# Allegro board VSC8541XMV_CUSTOMER_REF_BOARD_16-0351_PCB_0514.brd
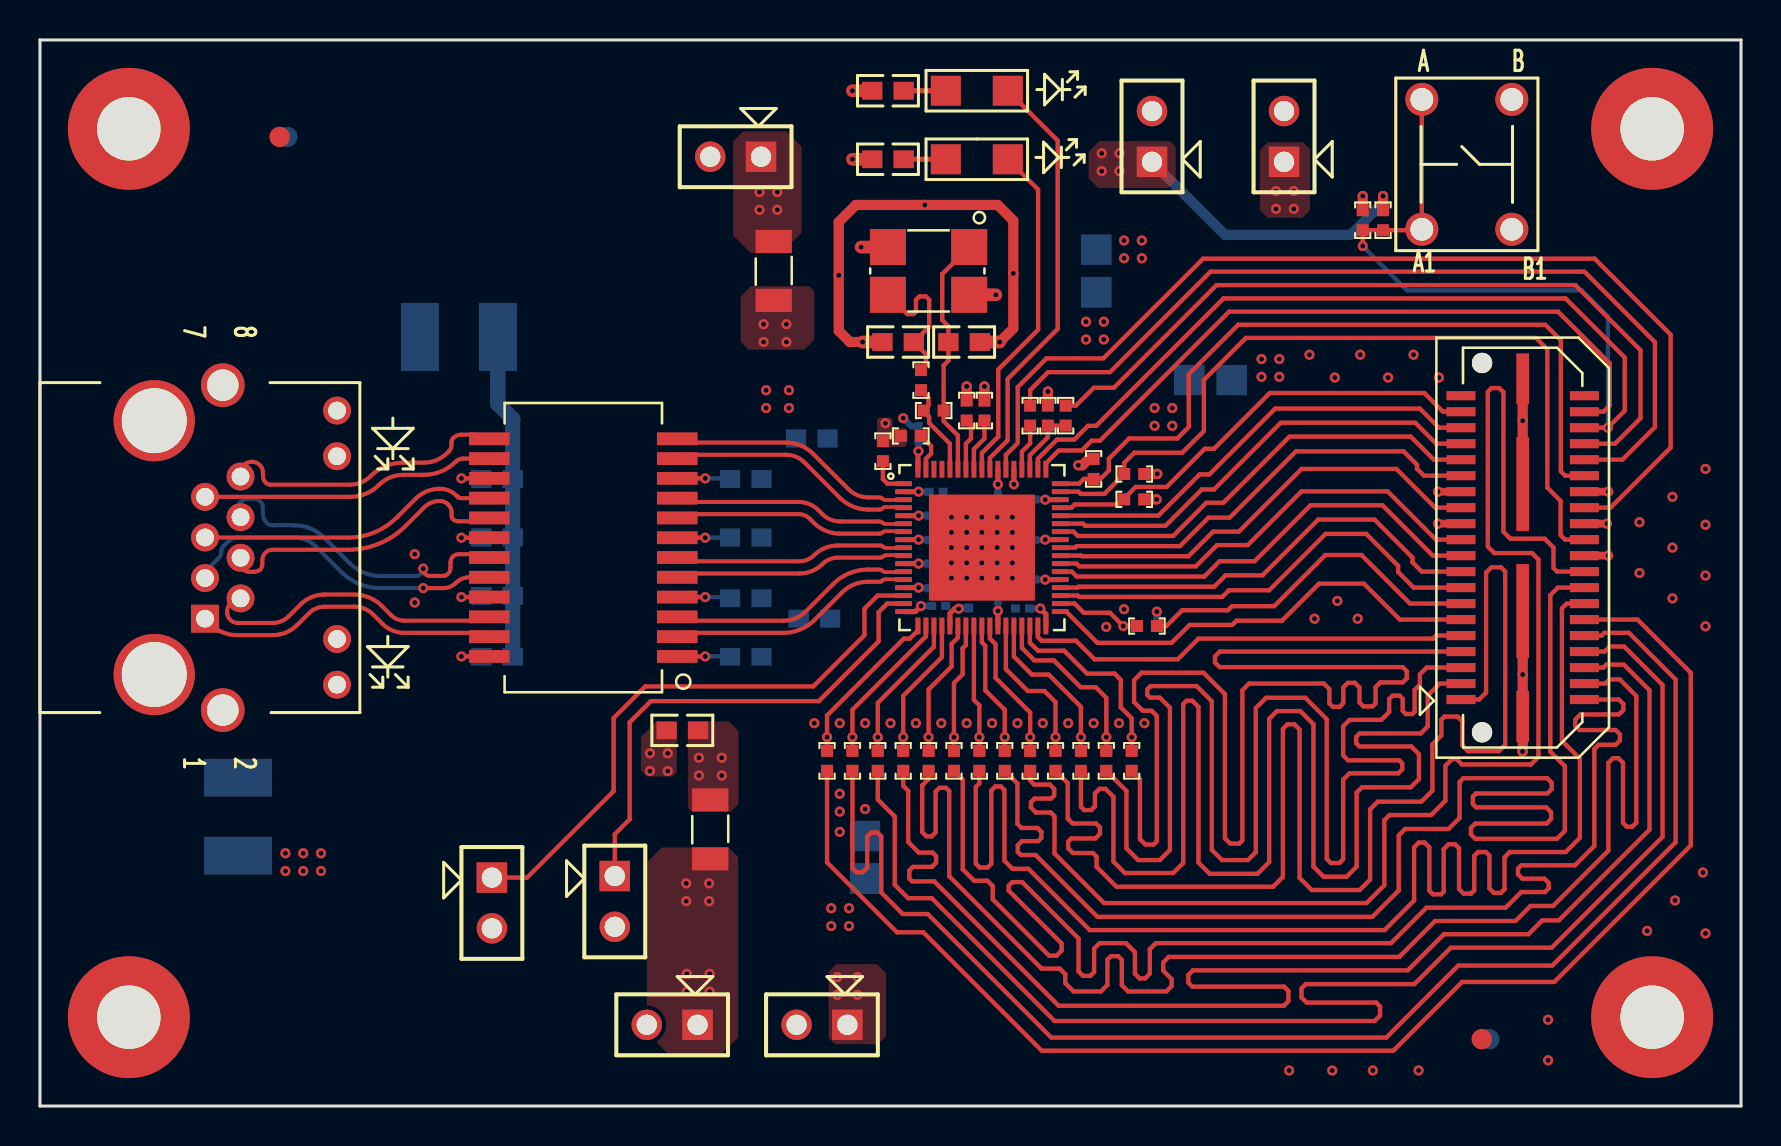
[diagram p0: board, top side]
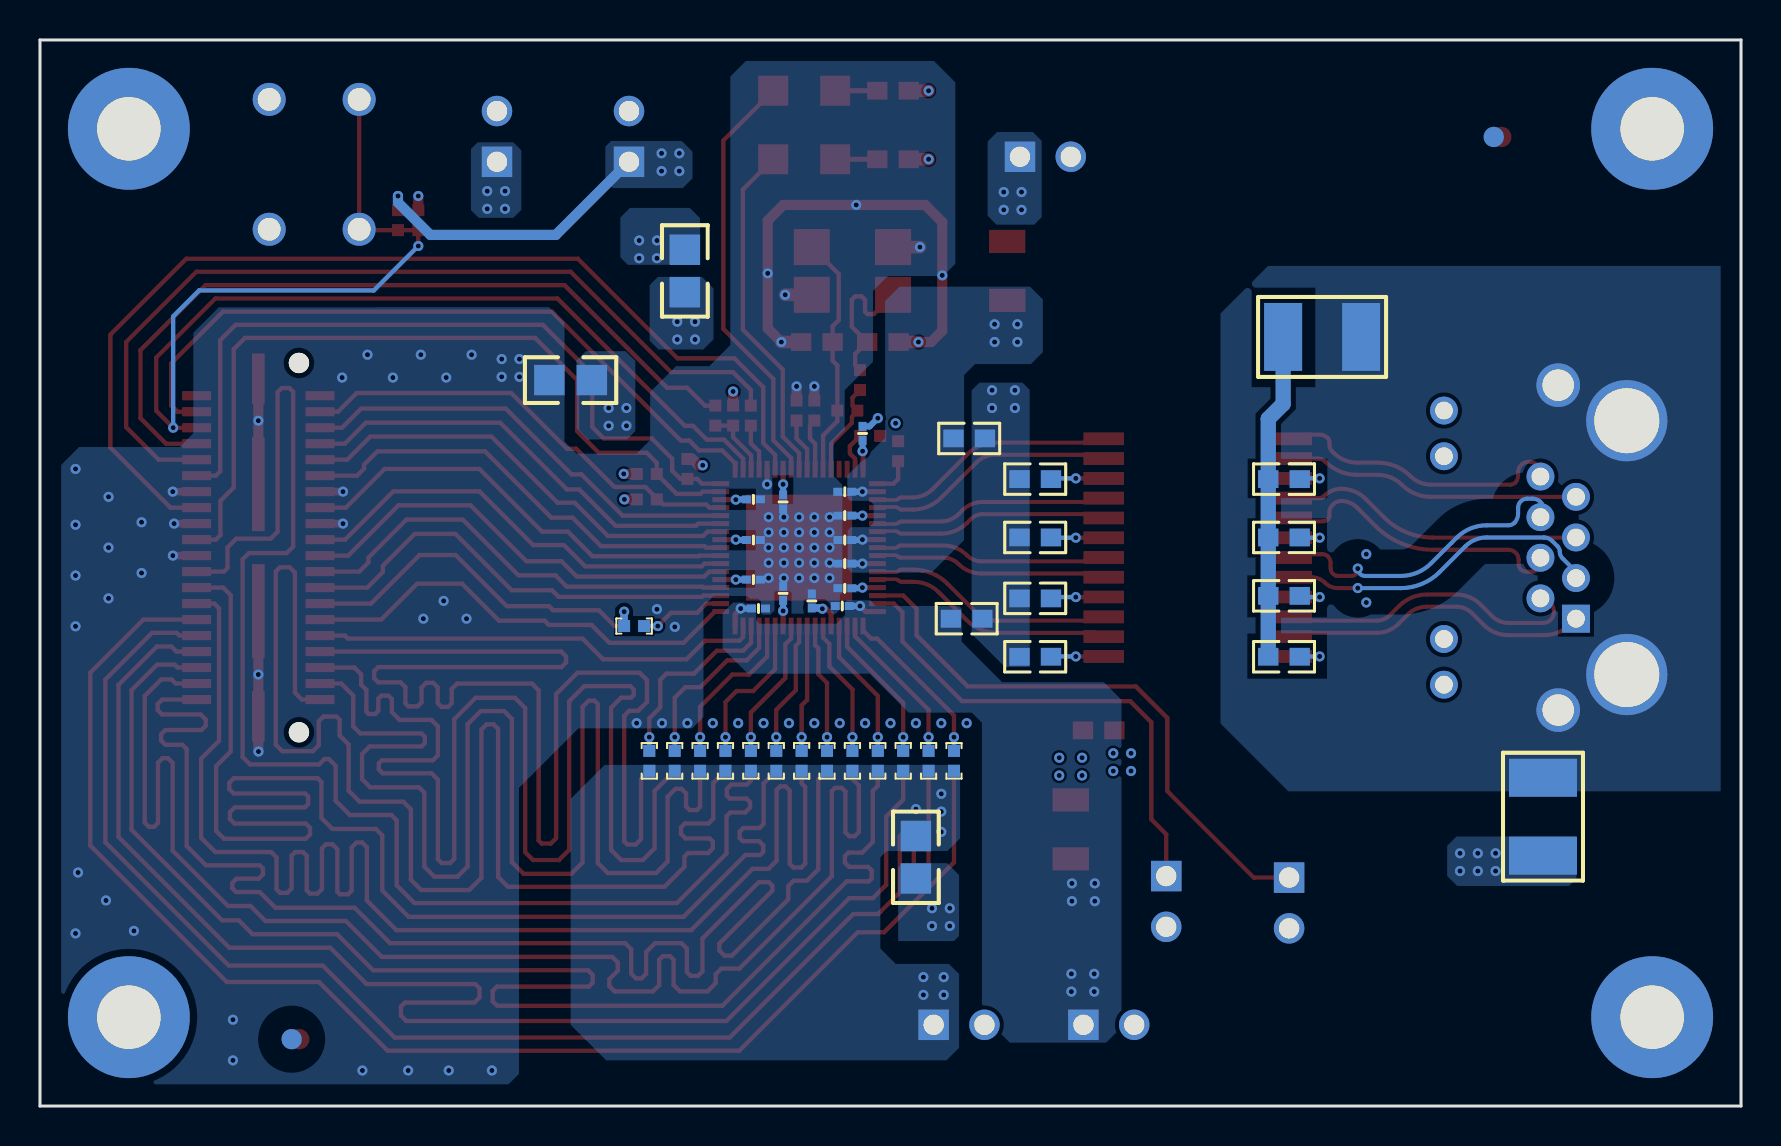
[diagram p1: board, bottom side, seen from below]

Outline 85.09 x 53.34 mm; copper layers: TOP, L2_GND, L3_PWR, BOTTOM. Coordinates in mm from the lower left corner of the outline.
Outline path: 0,53.34 85.09,53.34 85.09,0 0,0 0,53.34

## Design rules (mm)
net group CLKOUT: nets CLKOUT CLKOUT_QTE
net group COL: nets COL COL_0
net group CRS: nets CRS CRS_0
net group DIFFPAIR0: nets P0_D3N P0_D3P
net group DIFFPAIR1: nets P0_D2N P0_D2P
net group DIFFPAIR2: nets P0_D1N P0_D1P
net group DIFFPAIR3: nets P0_D0N P0_D0P
net group DIFFPAIR4: nets N53972067 N53972090
net group DIFFPAIR5: nets N53972061 N53972087
net group DIFFPAIR6: nets N53972063 N53972075
net group DIFFPAIR7: nets N53972077 N53972079
net group RCVRD_CLK: nets RCVRD_CLK RCVRD_CLK_QTE
net group RX_CLK: nets RX_CLK RX_CLK_0
net group RX_DV/RX_CTL: nets RX_DV/RX_CTL RX_DV/RX_CTL_0
net group RX_ER: nets RX_ER RX_ER_0
net group RXD0: nets RXD0 RXD0_0
net group RXD1: nets RXD1 RXD1_0
net group RXD2: nets RXD2 RXD2_0
net group RXD3: nets RXD3 RXD3_0
net group RXD4: nets RXD4 RXD4_0
net group RXD5: nets RXD5 RXD5_0
net group RXD6: nets RXD6 RXD6_0
net group RXD7: nets RXD7 RXD7_0
net group TX_CLK: nets TX_CLK TX_CLK_0
net group CLS1: nets N54023815 XTAL1 XTAL2
net group CLS2: nets GTX_CLK TX_EN/TX_CTL TX_ER TXD0 TXD1 TXD2 TXD3 TXD4 TXD5 TXD6 TXD7

## Placement (name value [footprint] x y rotation side)
C1  0.1uF  [C0603]  35.31 22.48 0 bottom
C2  0.1uF  [C0603]  35.31 25.4 0 bottom
C3  0.1uF  [C0603]  35.31 28.45 0 bottom
C4  0.1uF  [C0603]  35.31 31.37 0 bottom
C5  1000pF, 3KV  [C1812]  9.91 14.48 270 bottom
C14  0.01uF/16V/X5R  [C0402]  43.56 33.53 180 top
C16  0.1uF  [C0201]  47.92 30.23 270 bottom
C20  0.1uF  [C0201]  47.92 25.65 90 bottom
C21  0.1uF  [C0201]  49.4 26.34 180 bottom
C35  0.1uF  [C0201]  44.83 27.14 0 bottom
C40  0.1uF  [C0201]  43.94 33.66 90 bottom
C41  0.1uF  [C0201]  44.83 25.91 0 bottom
C42  0.1uF  [C0201]  44.83 29.54 0 bottom
C44  0.1uF  [C0201]  49.15 24.89 180 bottom
C45  0.1uF  [C0201]  44.96 25.02 0 bottom
C50  10uF  [C0603]  38.73 24.38 180 bottom
C51  10uF  [C0805]  58.55 36.32 0 bottom
C835  1000pF, 3KV  [C1812]  20.95 38.48 180 bottom
C836  0.1uF  [C0201]  49.4 30.35 180 bottom
C838  10uF  [C0603]  38.61 33.4 180 bottom
C840  0.1uF  [C0201]  49.4 28.32 180 bottom
C845  10uF  [C0805]  41.27 12.45 270 bottom
C849  0.1uF  [C0201]  44.83 28.32 0 bottom
C850  0.1uF  [C0201]  44.83 30.73 0 bottom
C869  10uF  [C0805]  52.83 41.78 90 bottom
C870  1uF  [0402]  66.17 44.32 270 top
C879  18pF_50V  [C0603]  46.23 38.23 0 top
C880  18pF_50V  [C0603]  42.93 38.23 180 top
C881  10uF  [C0603]  32.13 18.8 180 top
C882  0.1uF  [C0201]  46.48 25.27 90 bottom
D14  GREEN  [LED_1206]  46.86 47.37 0 top
D17  GREEN  [LED_1206]  46.86 50.8 0 top
J12  -  [RJHSE-5384]  9.14 27.94 270 top
J90  HEADER 1x2  [1X2HDR]  55.63 47.24 180 top
J92  HEADER 1x2  [1X2HDR]  62.23 47.24 180 top
J93  HEADER 1x2  [1X2HDR]  40.39 4.06 270 top
J94  HEADER 1x2  [1X2HDR]  36.07 47.5 270 top
J95  HEADER 1x2  [1X2HDR]  32.89 4.06 270 top
J96  -  [QTE-020-01-F-D-A]  74.17 27.94 90 top
J97  HEADER 1x2  [1X2HDR]  22.61 11.43 0 top
J98  HEADER 1x2  [1X2HDR]  28.75 11.51 0 top
L2  BLM31PG121SN  [COIL_1206]  36.7 41.78 90 top
L3  BLM31PG121SN  [COIL_1206]  33.53 13.84 270 top
NOREF  -  []  0 53.34 0 top
NOREF#2  -  [unnamed#2]  80.65 4.45 0 top
NOREF#3  -  [unnamed#3]  11.99 48.49 0 top
NOREF#4  -  []  85.09 53.34 0 top
NOREF#5  -  []  300.38 6.54 0 top
NOREF#6  -  []  4.45 4.45 0 top
NOREF#7  -  []  85.09 53.34 0 top
NOREF#8  -  [unnamed#2]  80.65 48.9 0 top
NOREF#9  -  [unnamed#2]  4.45 48.9 0 top
NOREF#10  -  [unnamed#3]  72.12 3.35 0 top
NOREF#11  -  [unnamed#2]  4.45 4.45 0 top
NOREF#12  -  []  85.09 0 0 top
NOREF#13  -  []  4.45 4.45 0 top
NOREF#14  -  [unnamed#3]  12.37 48.49 180 bottom
NOREF#15  -  [unnamed#3]  72.5 3.35 180 bottom
R1  75  [R0603]  22.86 31.37 0 bottom
R2  75  [R0603]  22.86 28.45 0 bottom
R3  75  [R0603]  22.86 22.48 0 bottom
R4  75  [R0603]  22.86 25.53 0 bottom
R5  510  [R0603]  42.42 47.37 0 top
R62  39_1%  [0402]  50.8 17.27 90 top
R63  39_1%  [0402]  49.53 17.27 90 top
R64  39_1%  [0402]  48.26 17.27 90 top
R65  39_1%  [0402]  46.99 17.27 90 top
R70  39_1%  [0402]  52.07 17.27 90 top
R398  39_1%  [0402]  54.61 17.27 90 top
R400  510  [R0603]  42.42 50.8 0 top
R412  10K  [R0402]  52.7 31.88 270 top
R417  2K_1%  [R0402]  42.16 32.77 270 top
R432  4.7K_1%  [R0402]  54.74 31.62 180 top
R434  2K  [R0402]  67.18 44.32 270 top
R470  39_1%  [0402]  51.31 34.54 90 top
R482  10k_1%  [0402]  50.8 17.27 90 bottom
R483  10k_1%  [0402]  49.53 17.27 90 bottom
R484  10k_1%  [0402]  48.26 17.27 90 bottom
R485  10k_1%  [0402]  46.99 17.27 90 bottom
R486  10k_1%  [0402]  45.72 17.27 90 bottom
R487  10k_1%  [0402]  44.45 17.27 90 bottom
R488  10k_1%  [0402]  43.18 17.27 90 bottom
R489  39_1%  [0402]  53.34 17.27 90 top
R490  39_1%  [0402]  40.64 17.27 90 top
R491  39_1%  [0402]  39.37 17.27 90 top
R492  39_1%  [0402]  44.45 17.27 90 top
R493  39_1%  [0402]  43.18 17.27 90 top
R494  39_1%  [0402]  45.72 17.27 90 top
R495  39_1%  [0402]  41.91 17.27 90 top
R500  39_1%  [0402]  49.53 34.54 90 top
R501  39_1%  [0402]  55.37 24.02 180 top
R502  10k_1%  [0402]  41.91 17.27 90 bottom
R504  10k_1%  [0402]  50.42 34.54 270 top
R505  10k_1%  [0402]  54.61 17.27 90 bottom
R506  10k_1%  [0402]  55.37 24.02 180 bottom
R507  10k_1%  [0402]  52.07 17.27 90 bottom
R508  10k_1%  [0402]  53.34 17.27 90 bottom
R509  10k_1%  [0402]  39.37 17.27 90 bottom
R510  10k_1%  [0402]  40.64 17.27 90 bottom
R523  10K  [R0402]  46.35 34.8 90 top
R524  10K  [R0402]  47.24 34.8 90 top
R527  39_1%  [0402]  44.07 36.32 90 top
R528  1M  [R0402]  44.7 34.8 0 top
R529  4.7K_1%  [R0402]  54.74 30.35 180 top
SW10  -  [EVQ-PAD04M]  71.37 47.12 0 top
U2  -  [TG111-MSCE13LF]  27.18 27.94 270 top
U169  VSC8541XMV  [QFN68_8X8]  47.12 27.94 90 top
X1  25MHz  [SMT_XTAL_5MMX3P2MM]  44.45 41.78 180 top

## Library data of the parts
C1-C4 = CAP_0
C5 C835 = CAP_1812
C14 = CAP_0402
C16 C20 C21 C35 C40-C42 C44 C45 C836 C840 C849 C850 C882 = CAP_0201
C50 C838 C879-C881 = CAP_0603
C51 C845 C869 = CAP_0805
C870 = CAPACITOR NON-POL
D14 D17 = LED_1206
J12 = RJHS-5384-04
J90 J92-J95 J97 J98 = CON2_3
J96 = QTE-020-01-F-D-A
L2 L3 = COIL_1206
R1-R5 R400 = RES_0603
R62-R65 R70 R398 R470 R489-R495 R500 R501 = R_0: signal model: R_0_0402_39_1%_39_1%
R412 R417 R434 R523 R524 R528 = RES_0402
R432 R482-R488 R502 R504-R510 R529 = RESISTOR
R527 = R_0
SW10 = PB_SWITCH_0
U2 = H5008NL
U169 = VSC8541XMV
X1 = XTAL-25M_0

## Footprints (pads in the part's own frame, mm; a bottom-side part is the same pattern mirrored in y, then rotated)
1X2HDR
  rect 1.524x1.524 hole 1.016: 1(0,0)
  round 1.524 hole 1.016: 2(0,-2.54)
0402
  rect 0.599x0.599 smd: 1(-0.5,0) 2(0.5,0)
C0201
  rect 0.45x0.4 smd: 1(-0.35,0) 2(0.35,0)
C0402
  rect 0.599x0.599 smd: 1(-0.5,0) 2(0.5,0)
C0603
  rect 1.016x0.889 smd: 1(-0.787,0) 2(0.787,0)
C0805
  rect 1.524x1.524 smd: 1(-1.062,0) 2(1.062,0)
C1812
  rect 1.9x3.4 smd: 1(-1.95,0) 2(1.95,0)
COIL_1206
  rect 1.16x1.82 smd: 1(-1.475,0) 2(1.475,0)
EVQ-PAD04M
  round 1.651 hole 1.143: A(-2.25,3.25) A1(-2.25,-3.25) B(2.25,3.25) B1(2.25,-3.25)
LED_1206
  rect 1.5x1.5 smd: 1(1.55,0) 2(-1.55,0)
QFN68_8X8
  rect 0.25x0.84 smd: 1(3.2,3.92) 2(2.8,3.92) 3(2.4,3.92) 4(2,3.92) 5(1.6,3.92) 6(1.2,3.92) 7(0.8,3.92) 8(0.4,3.92) 9(0,3.92) 10(-0.4,3.92) 11(-0.8,3.92) 12(-1.2,3.92) 13(-1.6,3.92) 14(-2,3.92) 15(-2.4,3.92) 16(-2.8,3.92) 17(-3.2,3.92) 35(-3.2,-3.92) 36(-2.8,-3.92) 37(-2.4,-3.92) 38(-2,-3.92) 39(-1.6,-3.92) 40(-1.2,-3.92) 41(-0.8,-3.92) 42(-0.4,-3.92) 43(0,-3.92) 44(0.4,-3.92) 45(0.8,-3.92) 46(1.2,-3.92) 47(1.6,-3.92) 48(2,-3.92) 49(2.4,-3.92) 50(2.8,-3.92) 51(3.2,-3.92)
  rect 0.84x0.25 smd: 18(-3.92,3.2) 19(-3.92,2.8) 20(-3.92,2.4) 21(-3.92,2) 22(-3.92,1.6) 23(-3.92,1.2) 24(-3.92,0.8) 25(-3.92,0.4) 26(-3.92,0) 27(-3.92,-0.4) 28(-3.92,-0.8) 29(-3.92,-1.2) 30(-3.92,-1.6) 31(-3.92,-2) 32(-3.92,-2.4) 33(-3.92,-2.8) 34(-3.92,-3.2) 52(3.92,-3.2) 53(3.92,-2.8) 54(3.92,-2.4) 55(3.92,-2) 56(3.92,-1.6) 57(3.92,-1.2) 58(3.92,-0.8) 59(3.92,-0.4) 60(3.92,0) 61(3.92,0.4) 62(3.92,0.8) 63(3.92,1.2) 64(3.92,1.6) 65(3.92,2) 66(3.92,2.4) 67(3.92,2.8) 68(3.92,3.2)
  rect 5.3x5.3 smd: 69(0,0)
QTE-020-01-F-D-A
  round 1.019 hole 1.016 unplated: (-9.239,2.032) (9.239,2.032)
  rect 0.457x1.448 smd: 1(-7.601,3.086) 2(-7.601,-3.086) 3(-6.801,3.086) 4(-6.801,-3.086) 5(-6.001,3.086) 6(-6.001,-3.086) 7(-5.201,3.086) 8(-5.201,-3.086) 9(-4.401,3.086) 10(-4.401,-3.086) 11(-3.6,3.086) 12(-3.6,-3.086) 13(-2.8,3.086) 14(-2.8,-3.086) 15(-2,3.086) 16(-2,-3.086) 17(-1.2,3.086) 18(-1.2,-3.086) 19(-0.4,3.086) 20(-0.4,-3.086) 21(0.4,3.086) 22(0.4,-3.086) 23(1.2,3.086) 24(1.2,-3.086) 25(2,3.086) 26(2,-3.086) 27(2.8,3.086) 28(2.8,-3.086) 29(3.6,3.086) 30(3.6,-3.086) 31(4.401,3.086) 32(4.401,-3.086) 33(5.201,3.086) 34(5.201,-3.086) 35(6.001,3.086) 36(6.001,-3.086) 37(6.801,3.086) 38(6.801,-3.086) 39(7.601,3.086) 40(7.601,-3.086)
  rect 2.54x0.635 smd: 42(-8.445,0) 45(8.445,0)
  rect 4.699x0.635 smd: 43(-3.175,0) 44(3.175,0)
R0402
  rect 0.599x0.599 smd: 1(-0.5,0) 2(0.5,0)
R0603
  rect 1.016x0.889 smd: 1(-0.787,0) 2(0.787,0)
RJHSE-5384
  rect 1.397x1.397 hole 0.889: 1(3.556,-0.889)
  round 1.397 hole 0.889: 2(2.54,0.889) 3(1.524,-0.889) 4(0.508,0.889) 5(-0.508,-0.889) 6(-1.524,0.889) 7(-2.54,-0.889) 8(-3.556,0.889) 9(6.858,5.715) 10(4.572,5.715) 11(-4.572,5.715) 12(-6.858,5.715)
  round 2.184 hole 1.575: 13(-8.128,0) 14(8.128,0)
  round 4.064 hole 3.251: 15(-6.35,-3.429) 16(6.35,-3.429)
SMT_XTAL_5MMX3P2MM
  rect 1.803x1.803 smd: 1(-2.032,-1.194) 2(2.032,-1.194) 3(2.032,1.194) 4(-2.032,1.194)
TG111-MSCE13LF
  rect 0.64x2.03 smd: 1(5.445,4.7) 2(4.455,4.7) 3(3.465,4.7) 4(2.475,4.7) 5(1.485,4.7) 6(0.495,4.7) 7(-0.495,4.7) 8(-1.485,4.7) 9(-2.475,4.7) 10(-3.465,4.7) 11(-4.455,4.7) 12(-5.445,4.7) 13(-5.445,-4.7) 14(-4.455,-4.7) 15(-3.465,-4.7) 16(-2.475,-4.7) 17(-1.485,-4.7) 18(-0.495,-4.7) 19(0.495,-4.7) 20(1.485,-4.7) 21(2.475,-4.7) 22(3.465,-4.7) 23(4.455,-4.7) 24(5.445,-4.7)
unnamed#2
  round 6.096 hole 3.175 unplated: (0,0)
unnamed#3
  round 1.016 smd: (0,0)

## Nets
GND: C1.2 C2.2 C3.2 C4.2 C5.2 C14.2 C16.2 C20.2 C21.2 C35.2 C40.2 C41.2 C42.2 C44.2 C45.2 C50.2 C51.2 C836.2 C838.2 C840.2 C845.2 C849.2 C850.2 C869.2 C870.1 C879.2 C880.2 C881.2 C882.2 J90.2 J92.2 J93.2 J94.2 J95.2 J96.20 J96.23 J96.24 J96.27 J96.28 J96.42(BLADE#42) J96.43(BLADE#43) J96.44(BLADE#44) J96.45(BLADE#45) J97.2 J98.2 R417.1 R523.2 R524.2 SW10.B SW10.B1 U169.56(COMA_MODE) U169.69(P_GND) X1.2 X1.4
GND_EARTH: C5.1 C835.2 J12.13(CASE_1) J12.14(CASE_2) J12.15(CASE_3) J12.16(CASE_4)
VDD1: C44.1 C45.1 C50.1 J95.1 L3.2 U169.17(VDD11) U169.34(VDD12)
VDD1A_FILT: C40.1 C41.1 C42.1 C881.1 L3.1 U169.5(VDD1A1) U169.14(VDD1A2) U169.68(VDD1A3)
VDD25: J94.1 L2.2
VDD25A_FILT: C35.1 C838.1 C849.1 C850.1 L2.1 U169.2(VDD25A1) U169.8(VDD25A2) U169.11(VDD25A3)
VDDIO: C16.1 C869.1 J90.1 R5.1 R400.1 R434.1 R504.1 U169.58(VDDIO)
VDDMAC: C20.1 C21.1 C840.1 C845.1 C882.1 J93.1 R482.1 R483.1 R484.1 R485.1 R486.1 R487.1 R488.1 R502.1 R505.1 R506.1 R507.1 R508.1 R509.1 R510.1 U169.22(VDDMAC1) U169.28(VDDMAC2) U169.39(VDDMAC3) U169.44(VDDMAC4)
VDDMDIO: C51.1 C836.1 J92.1 R412.1 R432.1 R529.1 U169.49(VDDMDIO)
CLK_SQUELCH_IN: J96.26 U169.57(CLK_SQUELCH_IN)
CLKOUT: R470.1 R504.2 U169.54(CLKOUT)
CLKOUT_QTE: J96.34 R470.2
COL: R491.2 R509.2 U169.18(COL)
COL_0: J96.12 R491.1
CRS: R490.2 R510.2 U169.19(CRS)
CRS_0: J96.10 R490.1
FASTLINK_FAIL: J96.38 U169.52(FASTLINK_FAIL)
GTX_CLK: J96.15 U169.37(TX_CLK)
LED0: D14.1(CATHODE) U169.60(LED0)
LED1: D17.1(CATHODE) U169.59(LED1)
MDC: J96.37 R529.2 U169.48(MDC)
MDINT: J96.30 R412.2 U169.51(MDINT)
MDIO: J96.22 R432.2 U169.50(MDIO)
NRESET: C870.2 J96.36 R434.2 SW10.A SW10.A1 U169.53(NRESET)
P0_D0N: U2.3(TD1-) U169.12(P0_D0N)
P0_D0P: U2.2(TD1+) U169.13(P0_D0P)
P0_D1N: U2.6(TD2-) U169.9(P0_D1N)
P0_D1P: U2.5(TD2+) U169.10(P0_D1P)
P0_D2N: U2.9(TD3-) U169.6(P0_D2N)
P0_D2P: U2.8(TD3+) U169.7(P0_D2P)
P0_D3N: U2.12(TD4-) U169.3(P0_D3N)
P0_D3P: U2.11(TD4+) U169.4(P0_D3P)
RCVRD_CLK: R500.1 U169.55(RCVRD_CLK)
RCVRD_CLK_QTE: J96.32 R500.2
REF_FILT: C14.1 U169.67(REF_FILT)
REF_REXT: R417.2 U169.1(REF_REXT)
REFCLK_SEL_0: R523.1 U169.62(REFCLK_SEL_0)
REFCLK_SEL_1: R524.1 U169.61(REFCLK_SEL_1)
RX_CLK: R398.2 R505.2 U169.32(RX_CLK)
RX_CLK_0: J96.7 R398.1
RX_DV/RX_CTL: R70.2 R507.2 U169.30(RX_DV/RX_CTL)
RX_DV/RX_CTL_0: J96.3 R70.1
RX_ER: R489.2 R508.2 U169.31(RX_ER)
RX_ER_0: J96.5 R489.1
RXD0: R62.2 R482.2 U169.29(RXD0)
RXD0_0: J96.1 R62.1
RXD1: R63.2 R483.2 U169.27(RXD1)
RXD1_0: J96.18 R63.1
RXD2: R64.2 R484.2 U169.26(RXD2)
RXD2_0: J96.16 R64.1
RXD3: R65.2 R485.2 U169.25(RXD3)
RXD3_0: J96.14 R65.1
RXD4: R486.2 R494.2 U169.24(RXD4)
RXD4_0: J96.2 R494.1
RXD5: R487.2 R492.2 U169.23(RXD5)
RXD5_0: J96.4 R492.1
RXD6: R488.2 R493.2 U169.21(RXD6)
RXD6_0: J96.6 R493.1
RXD7: R495.2 R502.2 U169.20(RXD7)
RXD7_0: J96.8 R495.1
THERMDA: J97.1 U169.15(THERMDA)
THERMDC_VSS: J98.1 U169.16(THERMDC_VSS)
TX_CLK: R501.2 R506.2 U169.36(MII_TXCLK)
TX_CLK_0: J96.13 R501.1
TX_EN/TX_CTL: J96.9 U169.33(TX_EN/TX_CTL)
TX_ER: J96.11 U169.35(TX_ER)
TXD0: J96.17 U169.38(TXD0)
TXD1: J96.19 U169.40(TXD1)
TXD2: J96.21 U169.41(TXD2)
TXD3: J96.25 U169.42(TXD3)
TXD4: J96.29 U169.43(TXD4)
TXD5: J96.31 U169.45(TXD5)
TXD6: J96.33 U169.46(TXD6)
TXD7: J96.35 U169.47(TXD7)
XTAL1: C879.1 R528.2 U169.63(XTAL1) X1.1
XTAL2: R527.1 R528.1 U169.64(XTAL2)
N53972047: C1.1 U2.1(TCT1)
N53972051: C2.1 U2.4(TCT2)
N53972055: C3.1 U2.7(TCT3)
N53972058: C4.1 U2.10(TCT4)
N53972061: J12.5 U2.16(MX3-)
N53972063: J12.6 U2.19(MX2-)
N53972065: R3.1 U2.24(MCT1)
N53972067: J12.8 U2.13(MX4-)
N53972068: R4.1 U2.21(MCT2)
N53972071: R2.1 U2.18(MCT3)
N53972073: R1.1 U2.15(MCT4)
N53972075: J12.3 U2.20(MX2+)
N53972077: J12.2 U2.22(MX1-)
N53972079: J12.1 U2.23(MX1+)
N53972087: J12.4 U2.17(MX3+)
N53972090: J12.7 U2.14(MX4+)
N53972340: C835.1 R1.2 R2.2 R3.2 R4.2
N54023815: C880.1 R527.2 X1.3
N54036519: D14.2(ANODE) R5.2
N54036521: D17.2(ANODE) R400.2

Pads without a net: J12 9 10 11 12; J96 39 40; U169 65 66

## Via types
v1: diameter 0.508, hole 0.254, TOP to BOTTOM, 210 vias

## Routing (per net, layer and track width the routed paths; a pad name or vN(x,y) marks a point on that pad's centre or on a via; arc(x,y) is an arc through that point)
GND: length 49.2
  TOP w0.254: U169.56 v1(48.72,31.11)
  TOP w0.381: J96.20 v1(78.44,27.54) ; J96.24 v1(78.38,29.14) ; J96.23 v1(69.93,29.14) ; J96.28 v1(78.45,30.74) ; J96.27 v1(69.93,30.74)
  TOP w0.508: J96.44 v1(74.17,34.29) J96.45 ; v1(74.16,17.74) 74.17,17.74 J96.42 v1(74.17,21.59) 74.17,24.77 ; v1(41.15,38.23) 40.51,38.23 39.96,38.78 v1(39.96,41.56) 39.96,44.23 40.81,45.09 v1(44.26,45.09) 47.91,45.09 48.69,44.31 v1(48.69,41.66) 48.69,38.91 v1(48.01,38.23) ; R524.2 v1(47.24,36.01) ; C870.1 v1(66.17,45.53) ; R523.2 v1(46.35,36.01)
  TOP w0.635: X1.2 v1(41.07,42.98) ; X1.4 v1(47.81,40.59) ; C880.2 v1(41.15,38.23) ; C879.2 v1(48.01,38.23)
  BOTTOM w0.305: v1(43.18,34.42) 43.59,34.01 C40.2
  vias: v1(12.28,12.65) v1(12.28,11.76) v1(13.17,12.65) v1(13.17,11.76) v1(14.06,12.65) v1(14.06,11.76) v1(30.51,17.65) v1(30.51,16.76) v1(31.4,17.65) v1(31.4,16.76) v1(36.32,35.81) v1(36.32,34.93) v1(37.46,35.81) v1(37.46,34.93) v1(38.73,19.16) v1(39.58,9.9) v1(39.58,9.01) v1(40,19.16) v1(40.47,9.9) v1(40.47,9.01) v1(41.27,19.16) v1(42.29,34.16) v1(42.55,19.16) v1(43.81,19.16) v1(45.09,19.16) v1(45.59,29.46) v1(45.59,28.7) v1(45.59,27.94) v1(45.59,27.18) v1(45.59,26.42) v1(46.35,29.46) v1(46.35,28.7) v1(46.35,27.94) v1(46.35,27.18) v1(46.35,26.42) v1(46.35,19.16) v1(47.12,29.46) v1(47.12,28.7) v1(47.12,27.94) v1(47.12,27.18) v1(47.12,26.42) v1(47.62,19.16) v1(47.88,29.46) v1(47.88,28.7) v1(47.88,27.94) v1(47.88,27.18) v1(47.88,26.42) v1(48.64,29.46) v1(48.64,28.7) v1(48.64,27.94) v1(48.64,27.18) v1(48.64,26.42) v1(48.89,19.16) v1(50.16,19.16) v1(51.43,19.16) v1(52.7,19.16) v1(53.33,23.98) v1(53.98,19.16) v1(54.23,43.31) v1(54.23,42.42) v1(54.23,24.86) v1(55.12,43.31) v1(55.12,42.42) v1(55.24,19.16) v1(61.1,37.37) v1(61.1,36.48) v1(61.99,37.37) v1(61.99,36.48) v1(62.48,1.78) v1(63.5,37.59) v1(63.75,24.38) v1(64.64,1.78) v1(64.77,36.45) v1(64.9,25.27) v1(65.91,24.38) v1(66.04,37.59) v1(66.68,1.78) v1(67.44,36.45) v1(68.71,37.59) v1(68.96,1.78) v1(69.98,36.45) v1(75.44,4.32) v1(75.44,2.29) v1(80.01,29.21) v1(80.01,26.67) v1(80.39,8.76) v1(81.66,30.48) v1(81.66,27.94) v1(81.66,25.4) v1(81.79,10.29) v1(83.19,11.68) v1(83.31,31.88) v1(83.31,29.08) v1(83.31,26.54) v1(83.31,24) v1(83.31,8.64)
GND_EARTH:
  vias: v1(18.75,27.61) v1(18.75,25.19)
VDD1: length 3.1
  TOP w0.254: v1(44.07,25.02) 43.79,24.74 U169.17 ; U169.34 50.32,24.61 v1(50.04,24.89)
  BOTTOM w0.305: C45.1 v1(44.07,25.02) ; C44.1 v1(50.04,24.89)
  vias: v1(32.33,11.14) v1(32.33,10.25) v1(32.35,6.61) v1(32.35,5.73) v1(33.47,11.14) v1(33.47,10.25) v1(33.5,6.61) v1(33.5,5.73)
VDD1A_FILT: length 4
  TOP w0.254: v1(43.94,32.77) 43.92,32.74 U169.68 ; U169.5 v1(43.95,29.54) ; U169.14 v1(43.95,25.94)
  BOTTOM w0.305: v1(43.95,25.94) 43.98,25.91 C41.1 ; C40.1 v1(43.94,32.77) ; C42.1 v1(43.95,29.54)
  vias: v1(32.96,17.43) v1(32.96,16.54) v1(34.1,17.43) v1(34.1,16.54)
VDD25:
  vias: v1(35.99,45.73) v1(35.99,44.84) v1(36.88,45.73) v1(36.88,44.84)
VDD25A_FILT: length 3.9
  TOP w0.254: U169.11 v1(43.95,27.14) ; U169.8 v1(43.95,28.34) ; U169.2 v1(43.95,30.74)
  BOTTOM w0.305: C850.1 43.96,30.73 v1(43.95,30.74) ; v1(43.95,28.34) 43.97,28.32 C849.1 ; C35.1 v1(43.95,27.14)
  vias: v1(36.2,39.12) v1(36.2,38.23) v1(37.34,39.12) v1(37.34,38.23)
VDDIO: length 18.8
  TOP w0.254: U169.58 v1(47.92,31.11)
  TOP w0.508: R434.1 v1(67.18,45.53) ; R504.1 v1(50.42,35.75)
  TOP w0.635: R400.1 v1(40.64,50.8) ; R5.1 v1(40.64,47.37)
  BOTTOM w0.305: C16.1 v1(47.92,31.11)
  BOTTOM w0.508: J90.1 59.28,43.59 65.56,43.59 67.18,45.21 v1(67.18,45.53)
  vias: v1(52.32,39.24) v1(52.32,38.35) v1(53.11,47.67) v1(53.11,46.78) v1(53.21,39.24) v1(53.21,38.35) v1(54,47.67) v1(54,46.78)
VDDMAC: length 6.3
  TOP w0.254: U169.44 v1(50.28,28.34) ; U169.22 45.52,24.65 45.75,24.88 v1(45.95,24.88) ; U169.39 v1(50.28,26.34) ; U169.28 v1(47.92,24.77)
  BOTTOM w0.305: C840.1 50.27,28.32 v1(50.28,28.34) ; C21.1 v1(50.28,26.34) ; C20.1 v1(47.92,24.77)
  BOTTOM w0.381: v1(55.87,24.74) 55.87,24.73 R506.1 ; v1(45.95,24.88) 45.99,24.92 C882.1
  vias: v1(39.88,6.45) v1(39.88,5.56) v1(40,15.62) v1(40,14.73) v1(40,13.72) v1(40.9,6.45) v1(40.9,5.56) v1(41.27,14.86)
VDDMDIO: length 3.5
  TOP w0.254: U169.49 v1(50.28,30.34)
  TOP w0.508: v1(55.89,31.63) 55.88,31.62 R432.1 ; R412.1 52.46,32.38 52.14,32.06 v1(51.94,32.06) ; R529.1 v1(55.86,30.35)
  BOTTOM w0.305: v1(50.28,30.34) 50.27,30.35 C836.1
  vias: v1(55.75,34.93) v1(55.75,34.04) v1(56.64,34.93) v1(56.64,34.04) v1(61.83,45.78) v1(61.83,44.89) v1(62.72,45.78) v1(62.72,44.89)
CLK_SQUELCH_IN: length 52.5
  TOP w0.216: U169.57 48.32,32.58 48.91,33.17 48.91,35.97 50.35,37.41 53.2,37.41 58.18,42.4 77.77,42.4 81.57,38.6 81.57,32.95 78.56,29.94 J96.26
CLKOUT: length 3.4
  TOP w0.216: R470.1 R504.2 50.42,33.46 49.52,32.56 U169.54
CLKOUT_QTE: length 39.3
  TOP w0.216: J96.34 78.79,33.14 80.06,34.42 80.06,37.82 76.8,41.07 58.85,41.07 53.72,35.94 52.72,35.94 51.82,35.04 R470.2
COL: length 9
  TOP w0.216: R491.2 v1(39.37,18.46) 39.37,19.54 43.21,23.39 43.51,23.39 43.92,23.8 U169.18
  BOTTOM w0.216: R491.2 v1(39.37,18.46)
COL_0: length 71
  TOP w0.216: R491.1 39.37,12.19 42.87,8.69 44.18,8.69 50.11,2.77 67.7,2.77 71.14,6.21 75.75,6.21 82.58,13.04 82.58,21.68 79.91,24.34 J96.12
CRS: length 8.5
  TOP w0.216: R490.2 v1(40.64,18.46) 40.64,19.82 44.32,23.5 U169.19
  BOTTOM w0.216: R490.2 v1(40.64,18.46)
CRS_0: length 71.5
  TOP w0.216: J96.10 78.12,23.54 78.25,23.68 79.48,23.68 81.82,21.34 81.82,13.2 75.65,7.03 70.95,7.03 67.35,3.43 50.59,3.43 44.41,9.61 43.16,9.61 42.08,10.68 42.08,13.49 41.89,13.69 41.58,13.69 41.38,13.48 41.38,11.93 41.15,11.7 40.85,11.7 40.64,11.9 R490.1
FASTLINK_FAIL: length 36.2
  TOP w0.216: U169.52 50.32,32.16 50.96,32.8 52.12,32.8 52.61,33.29 53.03,33.29 59.48,39.75 75.94,39.75 78.52,37.16 78.52,35.05 78.21,34.74 J96.38
GTX_CLK: length 22.7
  TOP w0.216: J96.15 68.72,25.94 67.94,26.72 67.94,27.03 66.34,28.63 64.31,28.63 61.49,25.81 59.48,25.81 59.15,25.48 51.98,25.48 51.91,25.54 U169.37
LED0: length 17.3
  TOP w0.216: U169.60 47.12,32.67 47.93,33.49 47.93,36.85 49.93,38.84 49.93,45.86 D14.1
LED1: length 21.4
  TOP w0.216: U169.59 47.52,32.42 48.4,33.31 48.4,36.38 50.91,38.88 50.91,48.31 D17.1
MDC: length 22.8
  TOP w0.216: J96.37 70.18,34.74 69.25,35.67 61.52,35.67 58.73,32.89 58.27,32.89 56.36,30.98 54.81,30.98 54.24,30.4 R529.2 54.15,30.35 53.9,30.1 51.76,30.1 51.6,29.94 U169.48
MDINT: length 38.4
  TOP w0.216: J96.30 76.29,31.54 76.08,31.76 76.08,38.31 75.3,39.09 59.94,39.09 57.46,36.62 57.46,33.98 56.89,33.4 54.48,33.4 53.47,32.39 53.47,31.8 53.05,31.38 R412.2 52.21,31.38 51.98,31.14 U169.51
MDIO: length 40.6
  TOP w0.216: J96.22 76.29,28.34 76.06,28.57 76.06,30.28 75.4,30.94 75.4,37.87 74.83,38.43 60.32,38.43 58.22,36.33 58.22,33.77 57.13,32.68 54.74,32.68 54.24,32.18 R432.2 53.24,30.63 52.06,30.63 51.94,30.74 U169.50
NRESET: length 69
  TOP w0.216: U169.53 49.92,32.39 50.87,33.34 51.73,33.34 52.43,34.03 52.83,34.03 59.2,40.41 76.31,40.41 79.27,37.45 79.27,34.78 v1(78.43,33.94) J96.36 ; SW10.A SW10.A1 69.08,43.82 R434.2 C870.2 v1(66.17,43.03)
  BOTTOM w0.216: v1(78.43,33.94) 78.43,39.51 77.13,40.81 68.39,40.81 v1(66.17,43.03)
P0_D0N: length 12.3
  TOP w0.178: U169.12 43.17,26.71 42.29,26.71 arc(42.24,26.72) 42.18,26.74 arc(42.16,26.76) 42.14,26.77
  TOP w0.203: 42.14,26.77 arc(42.07,26.82) 41.99,26.84 41.4,26.84 arc(40.48,26.66) 39.69,26.13 38.31,24.74 arc(37.8,24.4) 37.2,24.28 32.34,24.28 arc(32.09,24.33) U2.3
P0_D0P: length 12.3
  TOP w0.178: U169.13 43.18,26.36 42.3,26.36 arc(42.24,26.35) 42.18,26.32 arc(42.16,26.31) 42.14,26.29
  TOP w0.203: 42.14,26.29 arc(42.07,26.25) 41.99,26.23 41.4,26.23 arc(40.71,26.09) 40.12,25.7 38.74,24.31 arc(38.03,23.84) 37.2,23.68 32.34,23.68 arc(32.09,23.63) U2.2
P0_D1N: length 11.6
  TOP w0.178: U169.9 43.18,27.92 42.32,27.92 arc(42.25,27.93) 42.19,27.97
  TOP w0.203: 42.19,27.97 arc(42.11,28.03) 42.02,28.05 39.9,28.05 arc(39.26,27.92) 38.72,27.56 arc(38.38,27.33) 37.99,27.25 32.34,27.25 arc(32.09,27.3) U2.6
P0_D1P: length 11.6
  TOP w0.178: U169.10 43.17,27.56 42.33,27.56 arc(42.25,27.55) 42.19,27.51
  TOP w0.203: 42.19,27.51 arc(42.11,27.46) 42.02,27.44 39.9,27.44 arc(39.5,27.36) 39.15,27.12 arc(38.62,26.77) 37.99,26.65 32.34,26.65 arc(32.09,26.6) U2.5
P0_D2N: length 11.7
  TOP w0.178: U169.6 43.18,29.12 42.29,29.12 arc(42.22,29.13) 42.16,29.17
  TOP w0.203: U2.9 arc(32.09,30.27) 32.34,30.22 37.94,30.22 arc(38.48,30.12) 38.94,29.81 39.14,29.61 arc(39.54,29.34) 40.02,29.25 41.98,29.25 arc(42.08,29.23) 42.16,29.17
P0_D2P: length 11.7
  TOP w0.178: U169.7 43.17,28.77 42.29,28.77 arc(42.22,28.75) 42.16,28.71
  TOP w0.203: 42.16,28.71 arc(42.08,28.66) 41.99,28.64 40.02,28.64 arc(39.31,28.78) 38.71,29.18 38.51,29.38 arc(38.25,29.55) 37.94,29.62 32.34,29.62 arc(32.09,29.57) U2.8
P0_D3N: length 12.4
  TOP w0.178: U169.3 43.18,30.33 42.29,30.33 arc(42.23,30.33) 42.18,30.35 arc(42.16,30.37) 42.14,30.38
  TOP w0.203: U2.12 arc(32.09,33.24) 32.34,33.19 37.32,33.19 arc(38.05,33.05) 38.67,32.64 40.44,30.87 arc(40.9,30.56) 41.44,30.45 41.98,30.45 arc(42.07,30.43) 42.14,30.38
P0_D3P: length 12.4
  TOP w0.178: U169.4 43.17,29.97 42.29,29.97 arc(42.24,29.96) 42.19,29.94 arc(42.16,29.93) 42.14,29.91
  TOP w0.203: 42.14,29.91 arc(42.07,29.86) 41.99,29.84 41.44,29.84 arc(40.66,30) 40.01,30.44 38.24,32.21 arc(37.82,32.49) 37.32,32.59 32.34,32.59 arc(32.09,32.54) U2.11
RCVRD_CLK: length 2.4
  TOP w0.216: U169.55 49.12,32.74 49.53,33.15 R500.1
RCVRD_CLK_QTE: length 44.4
  TOP w0.216: J96.32 79.16,32.34 80.78,33.97 80.78,38.22 77.26,41.75 58.55,41.75 53.53,36.72 50.43,36.72 49.53,35.82 R500.2
REF_FILT: length 2
  TOP w0.216: C14.1 44.07,33.53 44.58,33.02 44.58,32.65 44.32,32.39 U169.67
REF_REXT: length 2
  TOP w0.216: U169.1 42.39,31.14 42.16,31.37 R417.2
REFCLK_SEL_0: length 2.6
  TOP w0.216: U169.62 46.32,33.14 46.57,33.4 46.57,34.08 R523.1
REFCLK_SEL_1: length 2.7
  TOP w0.216: U169.61 46.72,32.87 47.24,33.4 R524.1
RX_CLK: length 10.6
  TOP w0.216: U169.32 49.52,23.18 49.92,22.78 51.23,22.78 52.38,21.64 53.75,21.64 54.06,21.33 54.06,19.95 54.61,19.4 v1(54.61,18.46) R398.2
  BOTTOM w0.216: R398.2 v1(54.61,18.46)
RX_CLK_0: length 69.4
  TOP w0.216: J96.7 59.02,22.74 58.78,22.5 58.78,22.19 59.01,21.96 68.17,21.96 68.37,21.76 68.37,21.4 68.17,21.2 67.05,21.2 66.81,20.96 66.81,20.14 66.66,20 66.2,20 66,20.2 66,20.94 65.77,21.18 65.42,21.18 65.19,20.95 65.19,20.16 65.01,19.97 64.68,19.97 64.5,20.15 64.5,20.86 64.22,21.14 60.48,21.14 60.15,20.81 60.15,13.29 59.99,13.13 59.54,13.13 59.27,13.4 59.27,20.61 58.2,21.68 55.1,21.68 54.73,21.31 54.73,20.22 55.17,19.78 55.61,19.78 55.86,19.52 55.86,13.24 55.7,13.08 55.29,13.08 55.02,13.35 55.02,16.36 R398.1
RX_DV/RX_CTL: length 8.8
  TOP w0.216: U169.30 48.72,22.49 49.62,21.59 50.46,21.59 52.07,19.97 v1(52.07,18.46) R70.2
  BOTTOM w0.216: R70.2 v1(52.07,18.46)
RX_DV/RX_CTL_0: length 71.2
  TOP w0.216: J96.3 70.02,21.14 69.42,20.54 69.42,19 69.07,18.64 66.01,18.64 65.84,18.47 65.84,18.15 66,17.99 68.6,17.99 68.98,17.61 68.98,16.36 68.57,15.95 66.13,15.95 65.86,15.68 65.86,11.98 65.36,11.47 64.21,11.47 63.7,11.98 63.7,19.1 63.04,19.76 61.87,19.76 61.49,19.37 61.49,12.2 60.9,11.62 58.51,11.62 57.95,12.18 57.95,19.97 57.64,20.28 57.36,20.28 57.19,20.11 57.19,12.16 56.69,11.66 54.27,11.66 53.7,12.23 53.7,15.47 53.3,15.87 53,15.87 52.77,15.64 52.77,14.99 52.59,14.81 52.23,14.81 52.07,14.97 R70.1
RX_ER: length 9.7
  TOP w0.216: R489.2 v1(53.34,18.46) 53.34,20.42 52.81,20.95 52.05,20.95 50.71,22.3 49.74,22.3 49.12,22.92 U169.31
  BOTTOM w0.216: R489.2 v1(53.34,18.46)
RX_ER_0: length 70.3
  TOP w0.216: J96.5 69.37,21.94 69.03,21.6 69.03,21.08 68.76,20.82 68.76,19.73 68.65,19.61 68.32,19.61 68.17,19.77 68.17,20.38 68.01,20.53 67.66,20.53 67.49,20.36 67.49,19.71 67.09,19.32 65.51,19.32 65.19,19 65.19,17.55 65.44,17.3 67.99,17.3 68.14,17.15 68.14,16.84 67.95,16.65 65.5,16.65 65.19,16.33 65.19,12.35 65,12.16 64.57,12.16 64.37,12.37 64.37,19.35 63.29,20.43 61.33,20.43 60.82,19.91 60.82,12.7 60.42,12.31 59.13,12.31 58.62,12.82 58.62,20.25 57.86,21.01 55.56,21.01 55.39,20.84 55.39,20.57 55.52,20.43 56.02,20.43 56.52,19.93 56.52,12.81 56.01,12.31 54.94,12.31 54.35,12.9 54.35,15.77 R489.1
RXD0: length 8.4
  TOP w0.216: U169.29 48.32,21.86 49.41,20.76 50.24,20.76 50.8,20.21 v1(50.8,18.46) R62.2
  BOTTOM w0.216: R62.2 v1(50.8,18.46)
RXD0_0: length 71.6
  TOP w0.216: R62.1 51.41,16.16 51.41,14.38 51.65,14.14 52.83,14.14 53.03,13.94 53.03,13.62 52.79,13.39 51.59,13.39 51.43,13.23 51.43,12.89 51.67,12.66 52.67,12.66 52.85,12.48 52.85,11.97 53.85,10.97 61.68,10.97 62.17,11.46 62.17,18.87 62.4,19.1 62.75,19.1 63.01,18.84 63.01,11.42 63.62,10.81 66.02,10.81 66.54,11.33 66.54,14.84 66.92,15.23 69.1,15.23 69.65,15.78 69.65,18.09 70.1,18.54 70.1,19.33 70.26,19.49 70.91,19.49 71.15,19.25 71.15,18.05 71.44,17.75 72.97,17.75 73.29,18.08 73.29,26.74 73.08,26.96 72.6,26.96 72.34,26.69 72.34,20.68 71.99,20.34 J96.1
RXD1: length 7.8
  TOP w0.216: U169.27 47.52,23.39 47.8,23.11 47.8,21.42 49.53,19.69 v1(49.53,18.46) R63.2
  BOTTOM w0.216: R63.2 v1(49.53,18.46)
RXD1_0: length 72.2
  TOP w0.216: J96.18 75.89,26.74 75.71,26.92 75.71,27.95 75.27,28.39 73.55,28.39 73.21,28.73 73.21,35.71 73,35.92 72.61,35.92 72.42,35.74 72.42,27.99 72.75,27.67 74.64,27.67 74.96,27.35 74.96,17.46 74.58,17.09 71.13,17.09 70.86,17.36 70.64,17.36 70.3,17.03 70.3,15.28 69.59,14.56 67.51,14.56 67.25,14.3 67.25,11.05 66.35,10.15 53.23,10.15 50.75,12.63 50.75,14.5 50.56,14.69 49.81,14.69 49.57,14.94 49.57,15.2 49.75,15.38 50.58,15.38 50.73,15.53 50.73,15.87 50.52,16.08 49.73,16.08 49.53,16.29 R63.1
RXD2: length 7.4
  TOP w0.216: R64.2 v1(48.26,18.46) 48.26,19.82 47.28,20.8 47.28,23.03 47.12,23.2 U169.26
  BOTTOM w0.216: R64.2 v1(48.26,18.46)
RXD2_0: length 72.6
  TOP w0.216: R64.1 48.89,16.14 48.89,14.11 49.1,13.91 49.9,13.91 50.09,13.72 50.09,13.42 49.93,13.25 49.12,13.25 48.91,13.04 48.91,12.72 49.07,12.56 49.8,12.56 52.9,9.47 66.65,9.47 67.97,10.78 67.97,13.54 68.29,13.86 70.46,13.86 71.01,14.41 71.01,16.21 71.2,16.4 75.39,16.4 75.62,16.17 75.62,15.86 75.4,15.64 71.83,15.64 71.68,15.49 71.68,15.11 71.84,14.94 75.35,14.94 75.59,14.7 75.59,14.36 75.36,14.13 71.79,14.13 71.58,13.92 71.58,13.59 71.8,13.37 75.88,13.37 76.28,13.77 76.28,17.01 75.55,17.73 75.55,25.56 75.93,25.94 J96.16
RXD3: length 7
  TOP w0.216: U169.25 46.72,20.32 46.99,20.05 v1(46.99,18.46) R65.2
  BOTTOM w0.216: R65.2 v1(46.99,18.46)
RXD3_0: length 72.9
  TOP w0.216: J96.14 76.37,25.14 76.13,24.9 76.13,18.28 77.03,17.38 77.03,13.42 76.32,12.71 73.53,12.71 73.26,12.44 73.26,10.85 73.08,10.66 72.73,10.66 72.5,10.89 72.5,12.53 72.33,12.71 71.94,12.71 71.74,12.52 71.74,10.79 71.58,10.63 71.21,10.63 70.99,10.85 70.99,12.9 70.78,13.1 70.46,13.1 70.22,12.85 70.22,10.73 70.08,10.59 69.68,10.59 69.5,10.77 69.5,12.94 69.26,13.19 68.98,13.19 68.74,12.95 68.74,10.28 67.26,8.8 52.51,8.8 49.45,11.87 48.65,11.87 48.24,12.27 48.24,15.81 48.07,15.99 47.79,15.99 47.59,15.79 47.59,12.12 47.4,11.94 47.01,11.94 46.81,12.13 46.81,15.96 46.99,16.14 R65.1
RXD4: length 7.2
  TOP w0.216: R494.2 v1(45.72,18.46) 45.72,21.17 46.15,21.6 46.15,22.9 46.32,23.06 U169.24
  BOTTOM w0.216: R494.2 v1(45.72,18.46)
RXD4_0: length 72.8
  TOP w0.216: J96.2 78.98,20.34 79.2,20.12 79.2,19.81 78.98,19.59 77.06,19.59 76.8,19.33 76.8,19.03 77.01,18.81 78.82,18.81 79.03,18.6 79.03,18.29 78.82,18.07 77.97,18.07 77.75,17.86 77.75,13.01 76.78,12.04 74.1,12.04 73.93,11.88 73.93,11.59 74.15,11.38 75.25,11.38 75.47,11.16 75.47,10.89 75.28,10.71 74.1,10.71 73.31,9.92 69.35,9.92 67.58,8.15 55.82,8.15 55.52,7.85 55.52,6.62 55.28,6.39 55,6.39 54.77,6.62 54.77,7.7 54.32,8.15 53,8.15 52.73,7.88 52.73,6.7 52.54,6.51 52.17,6.51 51.95,6.74 51.95,8.38 49.13,11.2 48.63,11.2 48.46,11.03 48.46,10.78 51.1,8.13 51.1,7.78 50.85,7.52 50.48,7.52 47.66,10.34 47.66,11 47.39,11.28 46.73,11.28 46.16,11.84 46.16,16.33 R494.1
RXD5: length 7.5
  TOP w0.216: U169.23 45.92,23.44 45.6,23.12 45.6,22 44.45,20.84 v1(44.45,18.46) R492.2
  BOTTOM w0.216: R492.2 v1(44.45,18.46)
RXD5_0: length 72.5
  TOP w0.216: J96.4 78.3,21.14 78.5,21.34 79.02,21.34 79.85,20.52 79.85,14.18 79.64,13.97 79.38,13.97 79.19,14.17 79.19,17.18 78.96,17.4 78.69,17.4 78.45,17.17 78.45,12.78 75.69,10.01 74.56,10.01 73.81,9.26 69.79,9.26 67.99,7.46 56.46,7.46 56.19,7.19 56.19,6.77 56.61,6.35 56.61,6 56.34,5.73 54.43,5.73 54.12,6.05 54.12,7.32 53.93,7.5 53.57,7.5 53.4,7.32 53.4,6.06 53.07,5.73 51.7,5.73 51.29,6.15 51.29,6.6 51.01,6.88 50.1,6.88 45.48,11.5 45.48,15.76 45.32,15.92 44.99,15.92 44.8,15.73 44.8,13.69 44.6,13.5 44.34,13.5 44.13,13.71 44.13,16.05 44.45,16.37 R492.1
RXD6: length 7.7
  TOP w0.216: R493.2 v1(43.18,18.46) 43.18,20.52 45.12,22.46 U169.21
  BOTTOM w0.216: R493.2 v1(43.18,18.46)
RXD6_0: length 72.3
  TOP w0.216: R493.1 43.18,16.02 43.43,15.77 43.43,13.21 43.96,12.68 44.65,12.68 44.83,12.5 44.83,12.18 44.62,11.97 43.67,11.97 43.49,11.79 43.49,11.38 43.63,11.24 44.73,11.24 50.96,5.02 62.22,5.02 62.45,5.25 62.45,5.76 62.23,5.97 57.64,5.97 57.44,6.17 57.44,6.56 57.67,6.79 68.42,6.79 70.23,8.6 74.45,8.6 75.15,9.29 75.98,9.29 80.51,13.82 80.51,20.81 79.23,22.09 78.35,22.09 78.21,21.94 J96.6
RXD7: length 8.1
  TOP w0.216: R495.2 v1(41.91,18.46) 41.91,20.17 44.72,22.98 U169.20
  BOTTOM w0.216: R495.2 v1(41.91,18.46)
RXD7_0: length 71.9
  TOP w0.216: J96.8 78.27,22.74 78.52,22.99 79.24,22.99 81.16,21.07 81.16,13.47 75.62,7.92 70.57,7.92 68.75,6.1 63.31,6.1 63.1,5.89 63.1,5.43 63.36,5.18 66.84,5.18 67.03,4.98 67.03,4.52 66.76,4.25 50.75,4.25 44.61,10.4 43.43,10.4 42.76,11.07 42.76,14.49 41.91,15.33 R495.1
THERMDA: length 29.4
  TOP w0.216: U169.15 41.9,25.54 41.24,24.88 41.24,23.56 38.68,21 30.28,21 28.69,19.41 28.69,15.76 24.37,11.43 J97.1
THERMDC_VSS: length 25
  TOP w0.216: U169.16 42.38,25.14 41.95,24.71 41.95,23.25 38.96,20.26 30.56,20.26 29.5,19.2 29.5,14.34 28.75,13.6 J98.1
TX_CLK: length 5
  TOP w0.216: R501.2 v1(54.19,24.02) 53.52,24.68 52.21,24.68 51.76,25.14 U169.36
  BOTTOM w0.216: R501.2 v1(54.19,24.02)
TX_CLK_0: length 17.7
  TOP w0.216: J96.13 68.53,25.14 66.1,27.57 64.3,27.57 61.74,25.01 59.63,25.01 59.42,24.81 57.14,24.81 56.34,24.02 R501.1
TX_EN/TX_CTL: length 22.7
  TOP w0.216: J96.9 69.84,23.54 69.68,23.39 57.95,23.39 56.92,22.35 52.75,22.35 51.82,23.28 50.1,23.28 49.92,23.47 U169.33
TX_ER: length 22.7
  TOP w0.216: J96.11 68.02,24.34 66.23,26.14 63.98,26.14 62.13,24.28 59.85,24.28 59.64,24.07 57.51,24.07 56.61,23.17 52.9,23.17 51.33,24.74 U169.35
TXD0: length 22.7
  TOP w0.216: U169.38 51.91,25.94 51.96,25.98 58.74,25.98 59.31,26.55 61.15,26.55 63.94,29.34 66.75,29.34 68.66,27.44 68.66,27.2 69.12,26.74 J96.17
TXD1: length 22.7
  TOP w0.216: J96.19 69.67,27.54 67.15,30.06 63.56,30.06 60.76,27.26 59.01,27.26 58.24,26.49 51.86,26.49 51.61,26.74 U169.40
TXD2: length 22.7
  TOP w0.216: U169.41 51.85,27.14 51.99,27 57.81,27 58.88,28.07 60.42,28.07 63.1,30.75 67.41,30.75 69.83,28.34 J96.21
TXD3: length 22.7
  TOP w0.216: J96.25 69.79,29.94 67.85,31.88 63.11,31.88 59.97,28.74 58.68,28.74 57.45,27.51 52.12,27.51 52.09,27.54 U169.42
TXD4: length 22.7
  TOP w0.216: J96.29 69.23,31.54 68.88,31.89 68.88,32.09 68.21,32.76 62.83,32.76 59.51,29.44 58.45,29.44 57.03,28.02 51.86,28.02 51.78,27.94 U169.43
TXD5: length 22.7
  TOP w0.216: J96.31 69.72,32.34 68.56,33.5 62.51,33.5 59.19,30.19 58.34,30.19 56.68,28.52 51.92,28.52 51.7,28.74 U169.45
TXD6: length 22.7
  TOP w0.216: U169.46 52.17,29.14 52.28,29.03 56.3,29.03 58.12,30.85 58.73,30.85 62.07,34.19 68.79,34.19 69.84,33.14 J96.33
TXD7: length 22.7
  TOP w0.216: J96.35 69.98,33.94 69.02,34.9 61.79,34.9 58.5,31.61 58.01,31.61 55.94,29.54 U169.47
XTAL1: length 12.2
  TOP w0.216: X1.1 45.13,41.63 45.13,39.32 45.44,39.02 C879.1 45.44,37.29 45.2,37.06 R528.2 45.2,34.27 45.92,33.55 U169.63
XTAL2: length 4.8
  TOP w0.216: U169.64 45.52,33.14 44.48,34.18 44.48,34.48 44.2,34.75 R528.1 44.44,35.04 44.44,35.45 R527.1
N53972047: length 2.6
  TOP w0.216: U2.1 v1(33.28,22.5)
  BOTTOM w0.216: C1.1 34.5,22.5 v1(33.28,22.5)
N53972051: length 2.7
  TOP w0.216: U2.4 v1(33.28,25.47)
  BOTTOM w0.216: v1(33.28,25.47) 34.45,25.47 C2.1
N53972055: length 2.6
  TOP w0.216: U2.7 v1(33.28,28.44)
  BOTTOM w0.216: v1(33.28,28.44) 34.51,28.44 C3.1
N53972058: length 2.7
  TOP w0.216: U2.10 v1(33.28,31.41)
  BOTTOM w0.216: v1(33.28,31.41) 34.48,31.41 C4.1
N53972061: length 15.1
  TOP w0.203: U2.16 21.08,30.41 arc(21.02,30.42) 20.95,30.44 arc(20.95,30.45) 20.95,30.45 arc(20.92,30.47) 20.89,30.49 arc(20.88,30.5) 20.87,30.5 20.84,30.54 arc(20.46,30.79) 20,30.88 arc(19.34,30.75) 18.78,30.38 17.85,29.45 arc(16.74,28.7) 15.42,28.44 8.26,28.44 J12.5
N53972063: length 16.4
  TOP w0.203: v1(19.17,26.89) 19.17,26.85 arc(19.27,26.62) 19.49,26.52 20.18,26.52 arc(20.23,26.53) 20.28,26.55 arc(20.47,26.7) 20.53,26.92 20.53,27.19 arc(20.57,27.35) 20.66,27.49 arc(20.79,27.58) 20.95,27.61 22.08,27.61 arc(22.17,27.59) 22.25,27.54 arc(22.35,27.47) U2.19
  BOTTOM w0.203: J12.6 9.98,29.52 arc(9.89,29.65) 9.86,29.81 arc(10.02,30.22) 10.43,30.39 10.69,30.39 arc(11.02,30.26) 11.15,29.93 11.15,29.63 arc(11.2,29.39) 11.34,29.18 11.34,29.18 arc(11.47,29.09) 11.63,29.06 12.72,29.06 arc(13.53,28.9) 14.22,28.44 14.48,28.17 15.51,27.15 arc(16.2,26.69) 17.02,26.52 18.8,26.52 arc(19.06,26.63) v1(19.17,26.89)
N53972065: length 2.4
  TOP w0.216: U2.24 v1(21.08,22.5)
  BOTTOM w0.216: v1(21.08,22.5) 22.06,22.5 R3.1
N53972067: length 14.7
  TOP w0.203: U2.13 22.18,33.38 arc(22.09,33.4) 22.02,33.45 arc(21.86,33.55) 21.68,33.59 21.08,33.59 arc(20.86,33.55) 20.67,33.42 arc(20.61,33.33) 20.59,33.22 20.59,33.07 arc(20.55,32.91) 20.46,32.76 20.37,32.67 arc(19.84,32.32) 19.2,32.19 18.18,32.19 arc(17.28,32.01) 16.53,31.51 arc(16.06,31.2) 15.52,31.09 11.52,31.09 arc(11.4,31.11) 11.3,31.18 arc(11.19,31.34) 11.15,31.53 11.15,31.7 arc(11,32.08) 10.62,32.23 10.58,32.23 arc(10.19,32.07) 10.03,31.68 J12.8
N53972068: length 2.4
  TOP w0.216: U2.21 v1(21.08,25.47)
  BOTTOM w0.216: v1(21.08,25.47) 22.01,25.47 R4.1
N53972071: length 2.4
  TOP w0.216: U2.18 v1(21.08,28.44)
  BOTTOM w0.216: v1(21.08,28.44) 22.06,28.44 R2.1
N53972073: length 2.4
  TOP w0.216: U2.15 v1(21.08,31.41)
  BOTTOM w0.216: v1(21.08,31.41) 22.04,31.41 R1.1
N53972075: length 16.4
  TOP w0.203: U2.20 21.48,26.46 arc(21.11,26.38) 20.8,26.18 arc(20.52,25.98) 20.18,25.92 v1(19.17,25.92)
  BOTTOM w0.203: v1(19.17,25.92) 19.17,25.91 17.02,25.91 arc(15.97,26.12) 15.07,26.72 13.79,28.01 arc(13.3,28.33) 12.72,28.45 9.86,28.45 arc(9.86,28.45) 9.86,28.45 arc(9.64,28.4) 9.45,28.28 9.18,28 arc(9.09,27.88) 9.07,27.73 arc(9.03,27.55) 8.93,27.4 8.48,26.95 arc(8.31,26.7) J12.3
N53972077: length 15.4
  TOP w0.203: J12.2 10.03,25.4 arc(9.53,25.17) 9.37,24.63 9.37,24.63 arc(9.55,24.3) 9.9,24.17 11.64,24.17 arc(12.07,24.26) 12.44,24.5 13.03,25.1 arc(13.58,25.46) 14.23,25.59 15.72,25.59 arc(16.47,25.45) 17.1,25.02 17.57,24.56 arc(17.87,24.36) 18.22,24.28 22.02,24.28 arc(22.27,24.33) U2.22
N53972079: length 15.4
  TOP w0.203: J12.1 8.53,24.11 arc(8.71,23.95) 8.92,23.81 arc(9.37,23.62) 9.86,23.56 11.64,23.56 arc(12.31,23.69) 12.87,24.07 13.46,24.66 arc(13.82,24.9) 14.23,24.98 15.72,24.98 arc(16.23,24.88) 16.67,24.59 17.13,24.13 arc(17.63,23.79) 18.22,23.68 22.02,23.68 arc(22.27,23.63) U2.23
N53972087: length 15.2
  TOP w0.203: J12.4 10.03,27.17 arc(10.16,26.86) 10.47,26.73 10.69,26.73 arc(10.86,26.76) 11.01,26.84 arc(11.09,26.96) 11.12,27.11 11.12,27.32 arc(11.27,27.68) 11.64,27.83 15.42,27.83 arc(16.97,28.14) 18.28,29.02 19.21,29.95 arc(19.57,30.19) 20,30.27 arc(20.22,30.23) 20.41,30.11 20.44,30.07 arc(20.55,29.91) 20.59,29.72 20.59,29.53 arc(20.61,29.44) 20.66,29.36 arc(20.77,29.28) 20.9,29.26 22.08,29.26 arc(22.29,29.3) U2.17
N53972090: length 14.7
  TOP w0.203: J12.7 15.52,30.48 arc(16.3,30.64) 16.96,31.08 arc(17.52,31.45) 18.18,31.58 19.2,31.58 arc(20.07,31.75) 20.8,32.24 arc(20.92,32.33) 21.06,32.38 arc(21.11,32.39) 21.17,32.39 U2.14
N53972340: length 16.3
  BOTTOM w0.762: C835.1 22.9,35.13 23.65,34.39 R1.2 R2.2 R4.2 R3.2
N54023815: length 7.4
  TOP w0.216: X1.3 43.38,39.62 43.7,39.62 43.82,39.75 43.82,40.34 43.99,40.51 44.32,40.51 44.48,40.35 44.48,38.99 C880.1 44.32,37.63 44.32,37.07 R527.2
N54036519: length 2.1
  TOP w0.254: R5.2 D14.2
N54036521: length 2.1
  TOP w0.254: R400.2 D17.2

## Copper pours and planes (outline as drawn; the poured copper is in the pictures)
GND on TOP: 43.37,33.08 43.37,33.82 43.26,33.93 42.74,33.93 42.64,34.03 42.64,34.36 42.56,34.44 41.96,34.44 41.87,34.35 41.87,32.98 41.87,32.97 43.26,32.97
GND on TOP: 31.85,19.24 31.85,16.69 31.64,16.48 30.36,16.48 30.06,16.78 30.06,18.46 30.84,19.24
GND on BOTTOM: 52.07,42.09 52.07,44.41 52.59,44.94 55.58,44.94 56.06,44.45 56.06,42.47 55.68,42.09
GND on BOTTOM: 44.96,30.94 44.96,31.09 45.39,31.52 45.39,33.25 44.84,33.8 44.84,35.82 43.42,37.23 43.42,40.77 42.66,41.53 39.9,41.53 39.3,42.13 39.3,51.22 40.37,52.28 49.78,52.28 50.56,51.51 50.56,38.07 51.61,37.02 53.27,37.02 54.56,35.73 54.56,33.32 55.24,32.64 58.25,32.64 58.85,33.25 58.85,39.19 59.64,39.97 68.25,39.97 68.26,39.96 76.14,39.96 77.42,38.68 77.42,33.66 78.11,32.97 83.13,32.97 84.03,32.07 84.03,1.09 61.65,1.09 61.13,1.61 61.13,15.92 58.15,18.9 52.46,18.9 51.9,19.46 51.9,25.01 51.39,25.52 49.71,25.52 49.57,25.38 49.15,25.38 49.03,25.26 49.03,24.68 48.93,24.58 48.55,24.58 48.35,24.79 48.35,25.7 48.29,25.77 47.61,25.77 47.5,25.65 47.5,24.64 45.28,24.64 45.07,24.84 45.07,25.59 44.95,25.71 44.95,30.94 ; 5 cut-outs
GND on BOTTOM: 8.24,13.48 14.23,13.48 14.7,13.01 14.7,11.52 14.19,11.01 8.6,11.01 8.24,11.37
GND on BOTTOM: 35.59,21.97 35.59,35.84 35.94,36.2 38.1,36.2 38.48,35.81 38.48,23.62 36.83,21.97
GND on BOTTOM: 41.95,12.15 39.71,12.15 39.12,11.56 39.12,8.51 39.37,8.26 42.16,8.26 42.16,11.94
GND on L2_GND: 1.02,1.02 1.02,13.46 23.59,13.46 28.32,18.2 28.32,40.61 24.6,44.32 1.02,44.32 1.02,52.32 84.07,52.32 84.07,1.02 ; 4 cut-outs
GND on L3_PWR: 45.19,30.57 47.28,30.57 47.78,30.08 49.33,30.08 49.66,29.74 49.66,25.94 49.38,25.65 45.3,25.65 44.9,26.05 44.9,30.28
GND_EARTH on BOTTOM: 1.02,15.75 1.02,42.04 23.66,42.04 26.03,39.66 26.03,19.14 22.64,15.75 ; 5 cut-outs
GND_EARTH on L2_GND, L3_PWR: 1.02,15.75 1.02,42.04 23.66,42.04 26.03,39.66 26.03,19.14 22.64,15.75
VDD1 on TOP: 34.92,12.45 34.92,3.43 34.04,2.54 31.5,2.54 30.36,3.68 30.36,12.19 31.1,12.94 34.43,12.94
VDD1 on BOTTOM: 38.99,23.24 38.99,24.89 39.12,25.02 43.26,25.02 43.55,25.31 44.73,25.31 44.82,25.22 44.82,24.55 45.24,24.13 49.08,24.13 49.28,24.32 49.28,25.1 49.31,25.13 49.83,25.13 49.9,25.2 50.41,25.2 50.94,24.67 50.94,22.89 49.68,21.63 43.58,21.63 41.63,19.69 38.48,19.69 37.97,19.18 37.97,4.57 36.58,3.18 31.75,3.18 30.99,3.94 30.99,20.32 31.88,21.21 36.96,21.21
VDD1A_FILT on TOP: 32.41,19.25 34.46,19.25 34.94,18.77 34.94,15.11 34.56,14.73 32.61,14.73 32.41,14.93
VDD1A_FILT on L3_PWR: 43.68,33.62 44.25,33.05 44.25,21.08 41.49,18.32 38.9,18.32 37.95,17.37 37.95,1.02 1.02,1.02 1.02,13.46 23.62,13.46 28.32,18.16 28.32,32.77 29.17,33.62 ; 1 cut-out
VDD25 on TOP: 37.59,42.67 37.59,43.18 38.1,43.69 38.1,48.01 37.34,48.77 35.18,48.77 34.67,48.26 34.67,43.56 35.56,42.67
VDD25 on BOTTOM: 35.42,48.73 37.2,48.73 37.69,48.25 37.69,44.55 37.24,44.1 35.36,44.1 34.98,44.48 34.98,48.3
VDD25A_FILT on TOP: 35.56,41.02 38.48,41.02 38.73,40.77 38.73,38.35 38.23,37.85 35.43,37.85 35.05,38.23 35.05,40.51
VDD25A_FILT on BOTTOM: 42.1,41 42.81,40.28 42.81,33.44 44.7,31.55 44.7,30.42 44.56,30.28 43.57,30.28 43.39,30.1 43.39,29.18 43.6,28.96 44.52,28.96 44.7,28.79 44.7,26.91 44.48,26.69 40.49,26.69 38.86,28.32 38.86,36.58 38.31,37.12 35.52,37.12 34.92,37.72 34.92,40.36 35.56,41
VDDIO on TOP, BOTTOM: 52.99,48.28 56.53,48.28 56.81,48 56.81,46.3 56.44,45.93 52.94,45.93 52.45,46.41 52.45,47.75
VDDIO on BOTTOM: 51.98,41.49 54.18,41.49 54.59,41.07 54.59,38.3 54.15,37.85 51.9,37.85 51.4,38.35 51.4,40.91
VDDIO on L3_PWR: 47.74,30.81 49.08,30.81 49.35,31.08 49.35,33.38 58.44,42.48 58.44,52.31 1.02,52.31 1.02,44.32 24.64,44.32 28.32,40.64 28.32,35.81 29.34,34.8 43.81,34.8 44.96,33.66 44.96,32.26 45.97,31.24 47.31,31.24 ; 1 cut-out
VDDMAC on TOP: 39.45,3.4 39.45,6.72 39.82,7.1 41.87,7.1 42.32,6.64 42.32,3.49 41.93,3.09 39.76,3.09
VDDMAC on BOTTOM: 39.06,17.07 56.84,17.07 58.55,15.37 58.55,4.06 56.77,2.29 39.75,2.29 39.12,2.92 39.12,6.6 39.62,7.11 42.29,7.11 43.05,7.87 43.05,12.45 42.74,12.76 39.69,12.76 39.06,13.39
VDDMAC on L3_PWR: 50.02,28.5 50.02,25.31 49.85,25.14 45.73,25.14 45.11,24.52 45.11,20.52 42.1,17.51 39.24,17.51 38.83,17.1 38.83,1.02 83.44,1.02 83.44,28.85 50.37,28.85 ; 1 cut-out
VDDMDIO on TOP, BOTTOM: 61.41,48.22 63.19,48.22 63.53,47.88 63.53,44.82 63.15,44.44 61.41,44.44 61.02,44.83 61.02,47.83
VDDMDIO on BOTTOM: 55.8,37.77 57.77,37.77 58.25,37.29 58.25,33.91 57.69,33.35 55.73,33.35 55.31,33.77 55.31,37.28
VDDMDIO on L3_PWR: 59.76,42.37 49.98,32.59 49.98,30.17 50.6,29.54 83.31,29.54 83.31,52.32 59.76,52.32 ; 1 cut-out

## Text on the board
BOTTOM: LAYER 4 (BOTTOM)
Ref Des/Assembly Bottom: ASSEMBLY_BOTTOM
Ref Des/Silkscreen Bottom: 305-PD-16-0351 | MICROSEMI TECHNICAL SUPPORT | +1(800) 262-1060
TOP: LAYER 1 (TOP)
Ref Des/Assembly Top: ASSEMBLY_TOP
Ref Des/Silkscreen Top: VSC8541XMV_CUSTOMER_REF_BOARD | DVP-101-000XXX-001
L2_GND: LAYER 2 (GND)
L3_PWR: LAYER 3 (PWR)
PLACE_BOUND_TOP: 50 OHM | SINGLE | 8.5 mil | DIFFERENTIAL | 8/16 mil | 100 OHM | REV | A | INTIAL RELEASE | DESCRIPTION | REVISIONS | MAY 2016 | DATE | APPROVAL | 14.  IMPEDANCE TOLERANCE SHOULD BE +/- 10% | 10.  THIS IS A ROHS COMPLIANT BOARD | 11.  BOARD MUST BE UL 94V-1 APPROVED. | 12.  FABRICATE BOARD PER IPC-A-600D STANDARD. | 13.  CLIP SILKSCREEN ON NO MASK AREA. | 17.  REMOVE UNUSED PADS IN ALL INNER LAYERS. | 18.  BOARD DIMENSIONS ARE IN INCHES[MM]. | 15.  NO VENDOR LOGO, ART WORKS SHOULD NOT BE | 19.  WARP & TWIST: SHALL NOT EXCEED 0.005 INCHES PER INCH | 16.  DEBURR ALL SHARP EDGES | 5.  SILKSCREEN BOTH SIDES, WHITE. | 7.  SOLDER MASK TOP AND BOTTOM SIDES WITH | 2.  GENERAL PLATING - ENIG | 6.  FABRICATE PER DIMENSIONS SHOWN. | PLATING IN HOLES TO BE 0.001 MIN. THICK. | 4.  HOLE SIZES ARE AFTER PLATING. | 3.  HOLES TO BE PLATED THROUGH. | 9.  APPLY THIEVING AS REQUIRED. | NOTES: UNLESS OTHERWISE SPECIFIED | 8.  TOTAL BOARD THICKNESS:  55 mil+/- 5.5 mil | 1.  MATERIAL: FR-4. | SOLDER MASK.  COLOR GREEN. | LIQUID PHOTO IMAGABLE OR DRY FILM | 04 LAYER CONSTRUCTION. | CHANGED WITHOUT PRIOR APPROVAL FROM PACTRON | STACKUP - 4 LAYERS | REFER STACKUP | CONTROLLED IMPEDANCE REQUIRED
User.19: DATE: | FILM LAYER: | NAME: | MAY 2016 | VSC8541XMV_CUSTOMER_REF_BOARD | REV: | A | PACTRON
User.20: FAB | PROJECT NAME | PART NUMBER | PACTRON | DATE | 3000 PATRICK HENRY DRIVE, SANTA CLARA, CA 95054. | 408-329-5500(PHONE), 408-747-1239(FAX). | VSC8541XMV_CUSTOMER_REF_BOARD | DVP-101-000XXX-001 | MAY 2016 | 305-PD-16-0351 | REV : | A
User.23: TOTAL THICKNESS: 55.00 mils +/-5.5 mil. | DIELECTRIC (3.23 mils) | DIELECTRIC (44.45 mils) | TOP (1.40 mils) | L2_GND (1 0z) | L3_PWR (1 0z) | BOTTOM (1.40 mils) | FR-4
User.25: FIGURE | SIZE | 10.0 | 35.0 | 40.0 | 45.0 | 62.0 | 128.0 | 125.0 | DRILL CHART: TOP to BOTTOM | ALL UNITS ARE IN MILS | TOLERANCE | +3.0/-3.0 | +2.0/-2.0 | PLATED | NON-PLATED | QTY | 182 | 12 | 14 | 4 | 2
